# Allegro board pulse modulation.brd
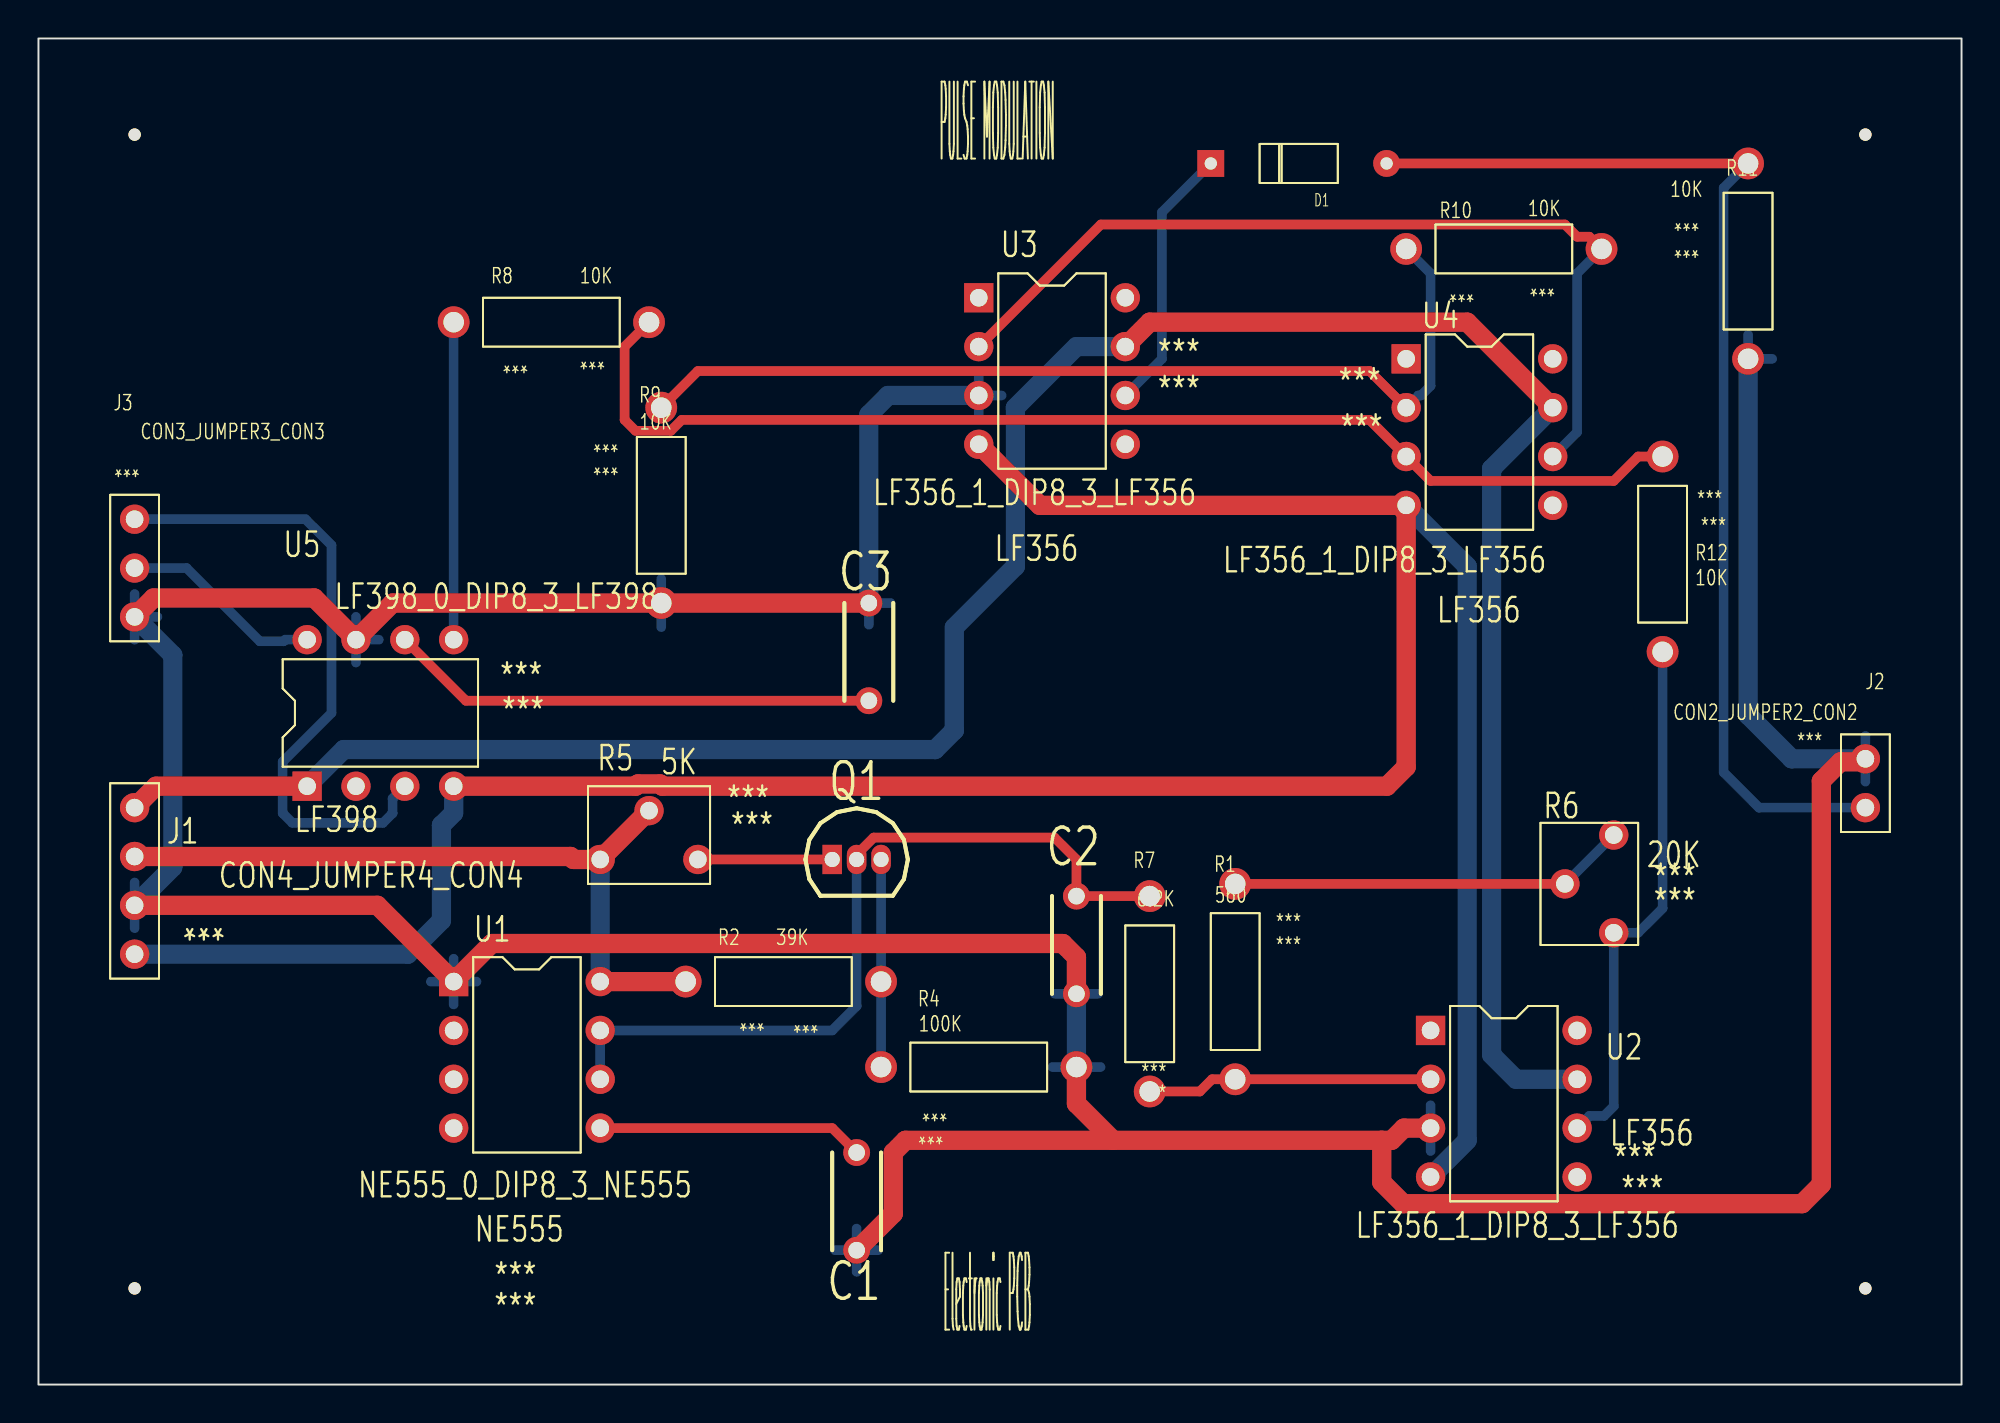
[diagram p0: board, top side]
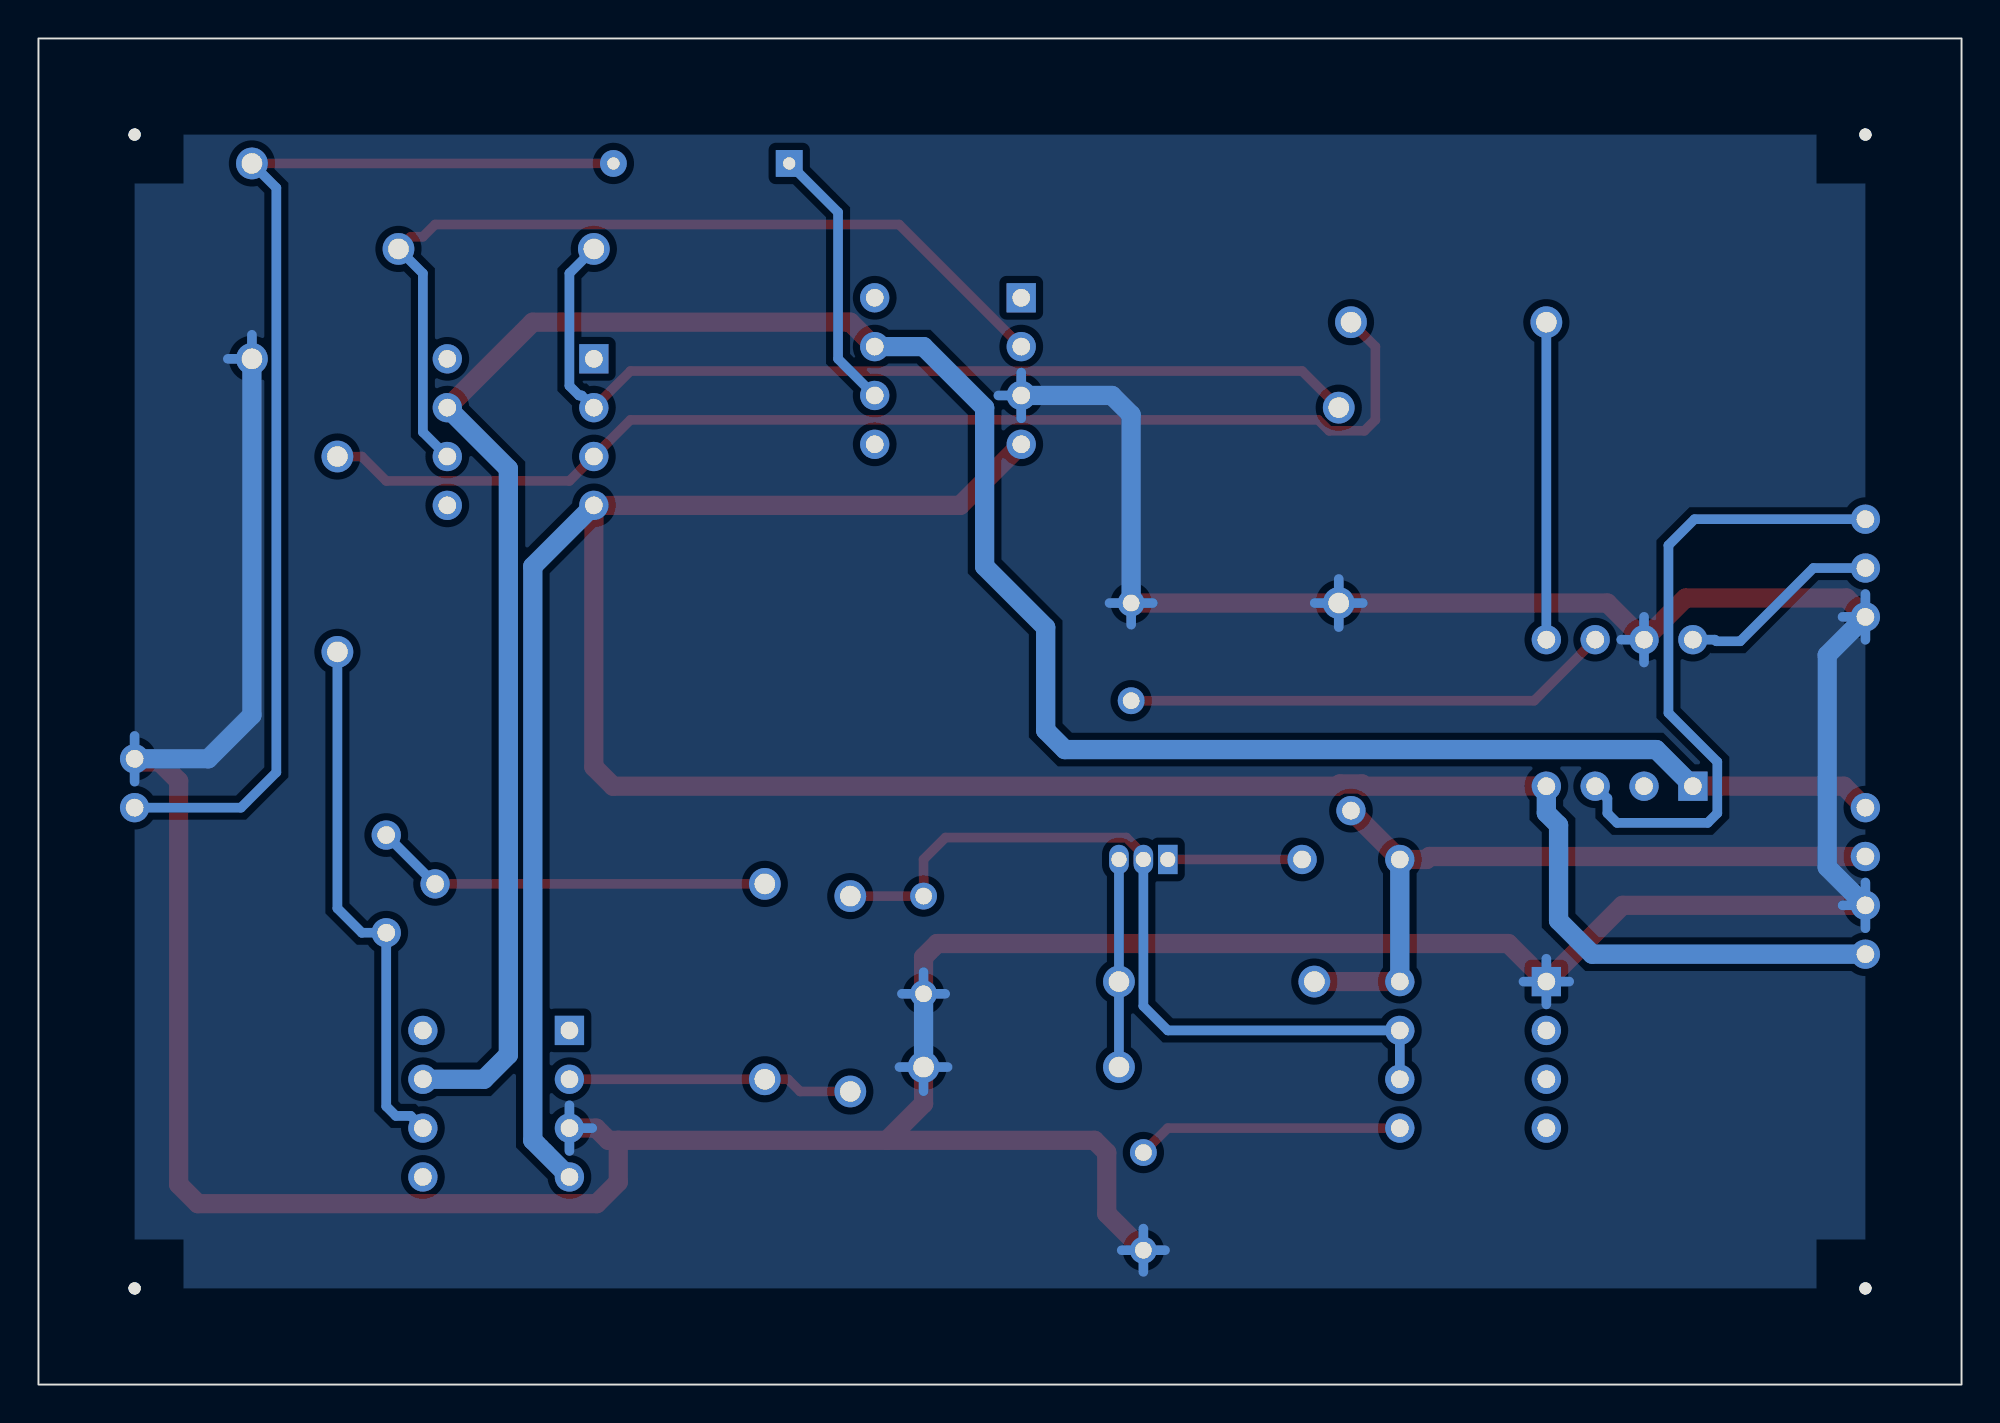
[diagram p1: board, bottom side, seen from below]

Outline 100 x 70 mm; copper layers: TOP, BOTTOM. Coordinates in mm from the lower left corner of the outline.
Outline path: rectangle 0,0 100,70

## Design rules (mm)
constraint set DEFAULT: min track width 0.5, pair gap 0.5
net group POWERNETS: nets +5V +15V -15V

## Placement (name value [footprint] x y rotation side)
C1  0.01uF  [RADCK05]  42.55 6.99 90 top
C2  0.01uF  [RADCK05]  53.98 20.32 90 top
C3  0.01uF  [RADCK05]  43.18 40.64 270 top
D1  D1S1588  [DO35]  60.96 63.5 270 top
J1  CON4  [JUMPER4]  5 30 270 top
J2  CON2  [JUMPER2]  95 30 90 top
J3  CON3  [JUMPER3]  5 45 270 top
NOREF  -  []  0 70 0 top
NOREF#2  -  [unnamed#2]  95 65 0 top
NOREF#3  -  [unnamed#2]  95 5 0 top
NOREF#4  -  [unnamed#2]  5 5 0 top
NOREF#5  -  [unnamed#2]  5 65 0 top
NOREF#6  -  []  100 0 90 top
Q1  Q2SA1015  [TO92]  41.27 27.3 0 top
R1  560  [RES400]  62.23 15.88 0 top
R2  39K  [RES400]  33.66 20.95 270 top
R4  100K  [RES400]  43.81 16.51 270 top
R5  5K  [RESADJ]  34.29 27.3 270 top
R6  20K  [RESADJ]  81.92 28.57 0 top
R7  6.2K  [RES400]  57.78 15.24 0 top
R8  10K  [RES400]  21.59 55.24 270 top
R9  10K  [RES400]  32.38 50.8 180 top
R10  10K  [RES400]  71.12 59.05 270 top
R11  10K  [RES400]  88.9 63.5 180 top
R12  10K  [RES400]  84.45 38.1 0 top
U1  NE555  [DIP8_3]  21.59 20.95 0 top
U2  LF356  [DIP8_3]  72.39 18.41 0 top
U3  LF356  [DIP8_3]  48.9 56.52 0 top
U4  LF356  [DIP8_3]  71.12 53.34 0 top
U5  LF398  [DIP8_3]  13.97 31.11 90 top

## Library data of the parts
C1-C3 = C
D1 = D1S1588
J1 = CON4: User Part Number: ***
J2 = CON2: User Part Number: ***
J3 = CON3: User Part Number: ***
Q1 = Q2SA1015
R1 R2 R4 R7-R12 = R: Tolerance: ***; User Part Number: ***
R5 R6 = POT: Tolerance: ***; User Part Number: ***
U1 = NE555_0: Tolerance: ***; User Part Number: ***
U2-U4 = LF356_1: Tolerance: ***; User Part Number: ***
U5 = LF398_0: Tolerance: ***; User Part Number: ***

## Footprints (pads in the part's own frame, mm; a bottom-side part is the same pattern mirrored in y, then rotated)
DIP8_3
  rect 1.524x1.524 hole 0.914: 1(0,0)
  round 1.524 hole 0.914: 2(0,-2.54) 3(0,-5.08) 4(0,-7.62) 5(7.62,-7.62) 6(7.62,-5.08) 7(7.62,-2.54) 8(7.62,0)
DO35
  rect 1.397x1.397 hole 0.635: 1(0,0)
  round 1.397 hole 0.635: 2(0,9.144)
JUMPER2
  round 1.524 hole 0.914: 1(0,0) 2(2.54,0)
JUMPER3
  round 1.524 hole 0.914: 1(0,0) 2(2.54,0) 3(5.08,0)
JUMPER4
  round 1.524 hole 0.914: 1(0,0) 2(2.54,0) 3(5.08,0) 4(7.62,0)
RADCK05
  round 1.397 hole 0.864: 1(0,0) 2(5.08,0)
RES400
  round 1.651 hole 1.067: 1(0,0) 2(0,10.16)
RESADJ
  round 1.524 hole 0.914: 1(0,0) 2(-2.54,-2.54) 3(0,-5.08)
TO92
  rect 1.016x1.524 hole 0.787: 1(0,0)
  oval 1.016x1.524 hole 0.787: 2(1.27,0) 3(2.54,0)
unnamed#2
  round 0.635 hole 3.175 unplated: (0,0)

## Nets
+5V: J1.2 R2.1 R5.2(WIPER) R5.3 U1.8(VCC)
+15V: J1.1 U2.7 U3.7 U4.7 U5.1
-15V: J1.4 U2.4(V-) U3.4(V-) U4.4(V-) U5.4(V-)
GND: C1.1 C2.1 C3.1 J1.3 J2.2 J3.3 R4.2 R9.2 R11.2 U1.1 U2.3 U3.3 U5.7
CLOCK: U1.2
SIG_1: R6.3 R12.1 U2.6
N00180: C2.2 Q1.2 R7.2 U1.6 U1.7
N00197: C1.2 U1.5
N00395: Q1.3 R2.2 R4.1
N01346: R1.1 R7.1 U2.2
N01478: R1.2 R6.1 R6.2(WIPER)
N02782: D1.2 J2.1 R11.1
N03231: D1.1 U3.6
N03245: R10.2 U3.2 U4.6
N03253: R9.1 R10.1 U4.2
N03468: R8.2 R12.2 U4.3
N03949: R8.1 U5.5
N04059: C3.2 U5.6
N04174: J3.1 U5.3
N04183: J3.2 U5.8
N005562: Q1.1(E) R5.1

Pads without a net: U1 3 4; U2 1 5 8; U3 1 5 8; U4 1 5 8; U5 2

## Routing (per net, layer and track width the routed paths; a pad name or vN(x,y) marks a point on that pad's centre or on a via; arc(x,y) is an arc through that point)
+5V: length 38.7
  TOP w1: J1.2 27.66,27.46 27.82,27.3 R5.3 R5.2 ; U1.8 R2.1
  BOTTOM w1: R5.3 U1.8
+15V: length 133.9
  TOP w1: U4.7 74.3,55.24 57.78,55.24 U3.7 ; J1.1 6.12,31.11 U5.1
  BOTTOM w1: U3.7 53.98,53.98 50.8,50.8 50.8,42.55 47.62,39.37 47.62,34.02 46.62,33.02 15.88,33.02 U5.1 ; U2.7 76.83,15.88 75.56,17.14 75.56,47.62 U4.7
-15V: length 148.1
  TOP w1: U5.4 31.05,31.11 31.17,31.23 32.33,31.23 32.45,31.11 70.12,31.11 71.12,32.12 U4.4 52.07,45.72 U3.4
  BOTTOM w1: U4.4 74.3,42.55 74.3,12.7 72.39,10.79 ; J1.4 19.2,22.38 20.95,24.13 20.95,29.09 21.59,29.73 U5.4
GND: length 291.9
  TOP w1: 55.88,12.7 45.09,12.7 44.45,12.06 44.45,8.89 C1.1 ; 55.88,12.7 53.98,14.61 53.98,16.51 ; 55.88,12.7 69.85,12.7 ; J1.3 17.62,24.92 U1.1 23.57,22.93 53.27,22.93 53.98,22.23 C2.1 ; 69.85,12.7 69.85,10.53 70.97,9.41 91.71,9.41 92.71,10.41 92.71,31.39 93.71,32.38 94.84,32.38 J2.2 ; 69.85,12.7 70.36,12.7 71,13.34 72.39,13.34 ; C3.1 R9.2 18.41,40.64 U5.7 14.34,40.9 5.98,40.9 J3.3
  BOTTOM w0.5: 42.55,5.86 C1.1 ; C1.1 41.42,6.99 ; C1.1 42.55,8.11 ; C1.1 43.67,6.99 ; C2.1 55.1,20.32 ; C2.1 53.98,21.45 ; C2.1 52.85,20.32 ; 95,33.73 J2.2 95,31.35 ; U3.3 50.08,51.44 ; U3.3 48.9,52.62 ; U3.3 48.9,50.25 ; 53.98,16.51 55.23,16.51 ; 53.98,16.51 52.72,16.51 ; 53.98,16.51 53.98,15.26 ; 42.05,40.64 C3.1 ; C3.1 44.3,40.64 ; C3.1 43.18,39.52 ; 88.9,54.59 R11.2 90.15,53.34 ; R9.2 33.64,40.64 ; R9.2 32.38,41.89 ; R9.2 32.38,39.39 ; R9.2 31.13,40.64 ; U5.7 17.7,38.73 ; U5.7 16.51,37.55 ; U5.7 16.51,39.92 ; 20.4,20.95 U1.1 ; U1.1 22.78,20.95 ; U1.1 21.59,22.14 ; U1.1 21.59,19.77 ; 5,38.73 J3.3 ; J3.3 6.19,39.92 ; J3.3 5,41.11 ; 72.39,12.15 72.39,13.34 ; 72.39,13.34 71.2,13.34 ; 72.39,13.34 72.39,14.52 ; 5,23.73 J1.3 ; J1.3 6.19,24.92 ; J1.3 5,26.11
  BOTTOM w1: J2.2 91.17,32.54 88.9,34.81 R11.2 ; J3.3 6.99,37.94 6.99,26.91 J1.3 ; C2.1 53.98,16.51 ; U3.3 44.18,51.44 43.18,50.44 C3.1
SIG_1: length 27.8
  BOTTOM w0.5: R12.1 84.45,24.77 83.19,23.5 81.92,23.5 81.92,14.47 81.42,13.97 80.64,13.97 80.01,13.34
N00180: length 42.3
  TOP w0.5: R7.2 C2.2 53.98,27.3 52.84,28.44 43.43,28.44 42.55,27.56 Q1.2
  BOTTOM w0.5: Q1.2 42.55,19.68 41.27,18.41 U1.7 29.21,15.88
N00197: length 13.9
  TOP w0.5: 29.21,13.34 41.27,13.34 42.55,12.06
N00395: length 10.8
  BOTTOM w0.5: Q1.3 R2.2 R4.1
N01346: length 14.9
  TOP w0.5: U2.2 R1.1 61.03,15.88 60.39,15.24 R7.1
N01478: length 20.7
  TOP w0.5: R1.2 R6.2
  BOTTOM w0.5: R6.1 R6.2
N02782: length 59.1
  TOP w0.5: D1.2 R11.1
  BOTTOM w0.5: R11.1 87.63,62.23 87.63,31.84 89.47,30 J2.1
N03231: length 13.9
  BOTTOM w0.5: D1.1 58.42,60.96 58.42,53.34 U3.6
N03245: length 47.4
  TOP w0.5: R10.2 80.64,59.69 80.01,59.69 79.38,60.33 55.24,60.33 U3.2
  BOTTOM w0.5: U4.6 80.01,49.53 80.01,57.78 R10.2
N03253: length 49.7
  TOP w0.5: U4.2 69.22,52.7 34.29,52.7 R9.1
  BOTTOM w0.5: U4.2 71.75,51.44 71.89,51.44 72.39,51.94 72.39,57.78 R10.1
N03468: length 61.9
  TOP w0.5: R12.2 83.19,48.26 81.92,46.99 72.39,46.99 U4.3 69.22,50.16 33.45,50.16 32.88,49.6 31.05,49.6 30.48,50.16 30.48,53.98 R8.2
N03949: length 16.5
  BOTTOM w0.5: R8.1 U5.5
N04059: length 25.4
  TOP w0.5: C3.2 22.23,35.56 U5.6
N04174: length 33.6
  BOTTOM w0.5: U5.3 18.41,30.48 18.41,29.71 17.91,29.21 13.2,29.21 12.7,29.71 12.7,32.38 15.24,34.92 15.24,43.65 13.88,45 J3.1
N04183: length 10.6
  BOTTOM w0.5: U5.8 12.83,38.73 12.75,38.65 11.51,38.65 7.7,42.46 J3.2
N005562: length 7
  TOP w0.5: R5.1 Q1.1

## Copper pours and planes (outline as drawn; the poured copper is in the pictures)
GND on BOTTOM: 95,5 95,65 5,65 5,5 ; 2 cut-outs

## Text on the board
Ref Des/Silkscreen Top: PULSE MODULATION | Electronic PCB
DIMENSION: FIGURE | FINISHED_SIZE | 0.635 | 0.787 | 0.864 | 0.914 | 1.067 | 3.175 | DRILL CHART: TOP to BOTTOM | ALL UNITS ARE IN MILLIMETERS | PLATED | NON-PLATED | QTY | 2 | 3 | 6 | 55 | 18 | 4
